# Altium PCB HeaterDongle.PcbDoc
Units mil, origin at the board's own origin, x right, y up, seen from the top; angles counter-clockwise.
Board outline 1230 x 2745 mil, 4 copper layers (Top Layer, Internal Plane 1, Internal Plane 2, Bottom Layer), stack 30.634 mil thick; 7 components, 6 nets, 54 pads, 1 vias.
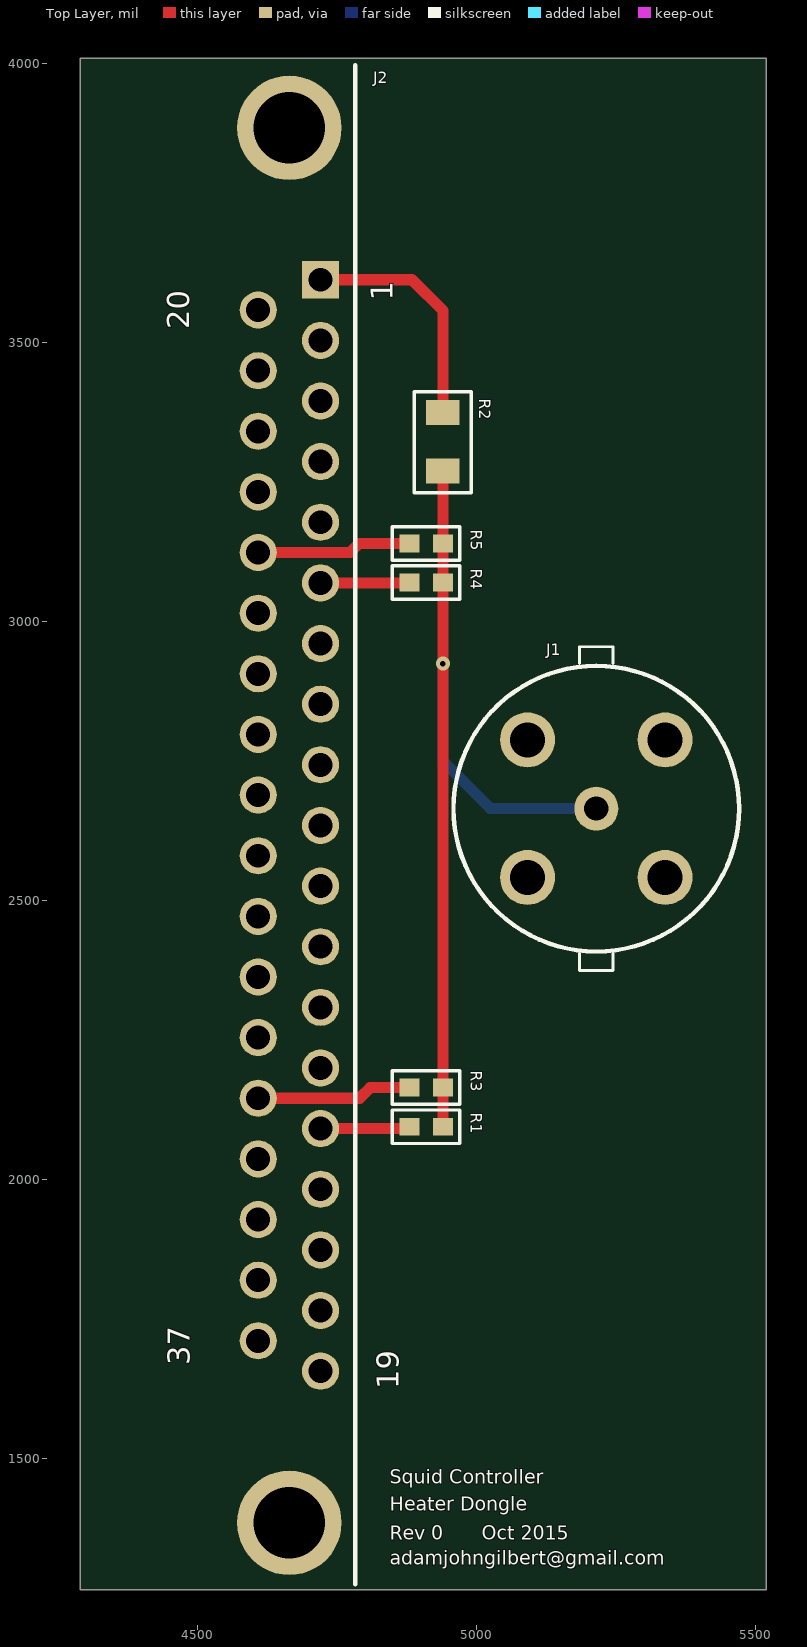
[diagram p0: Top Layer view]
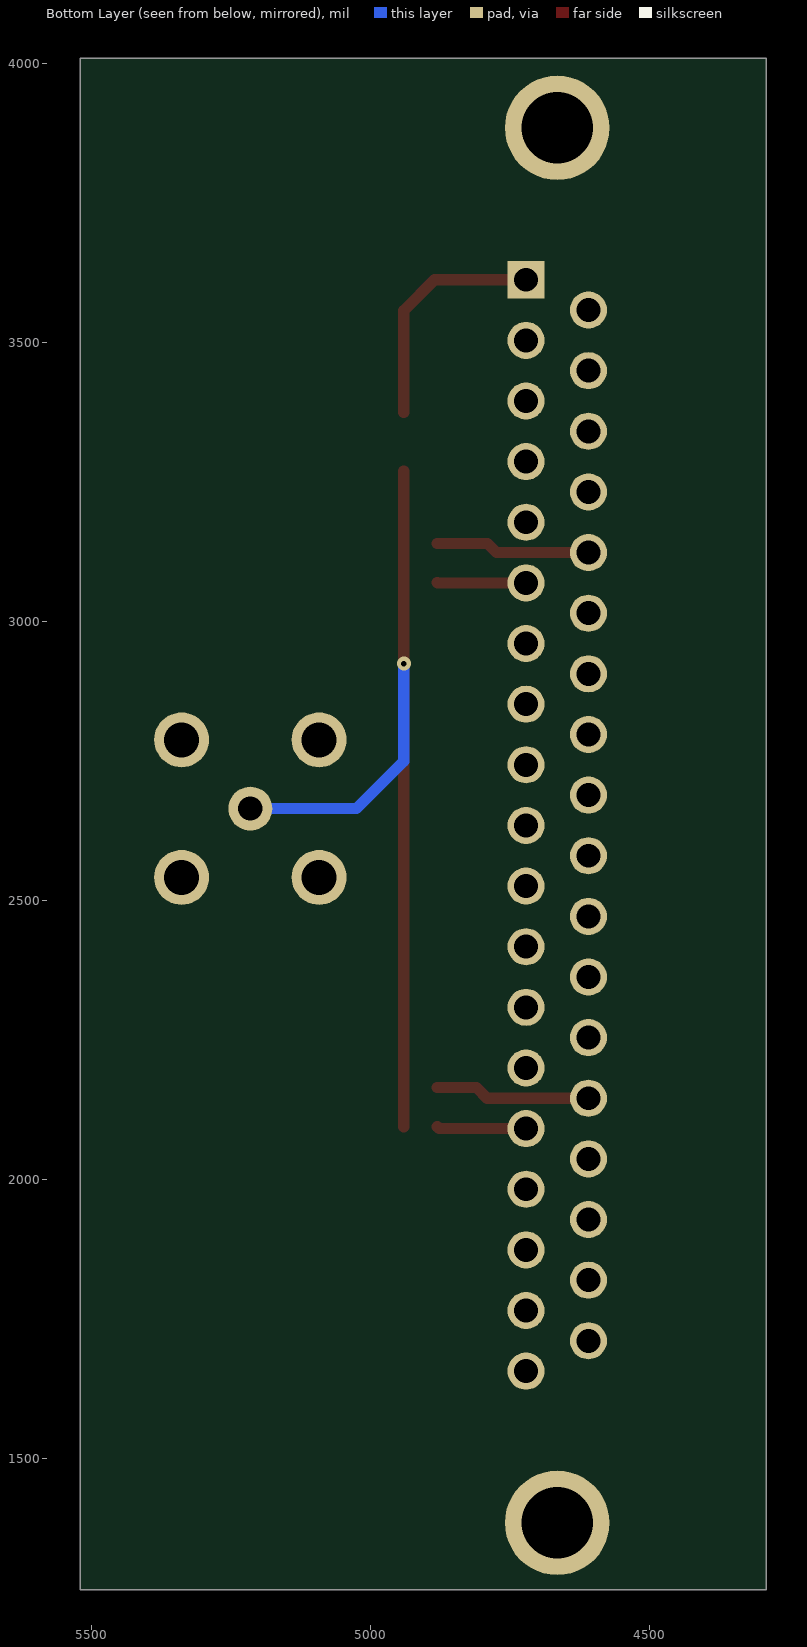
[diagram p1: Bottom Layer view, seen from below]
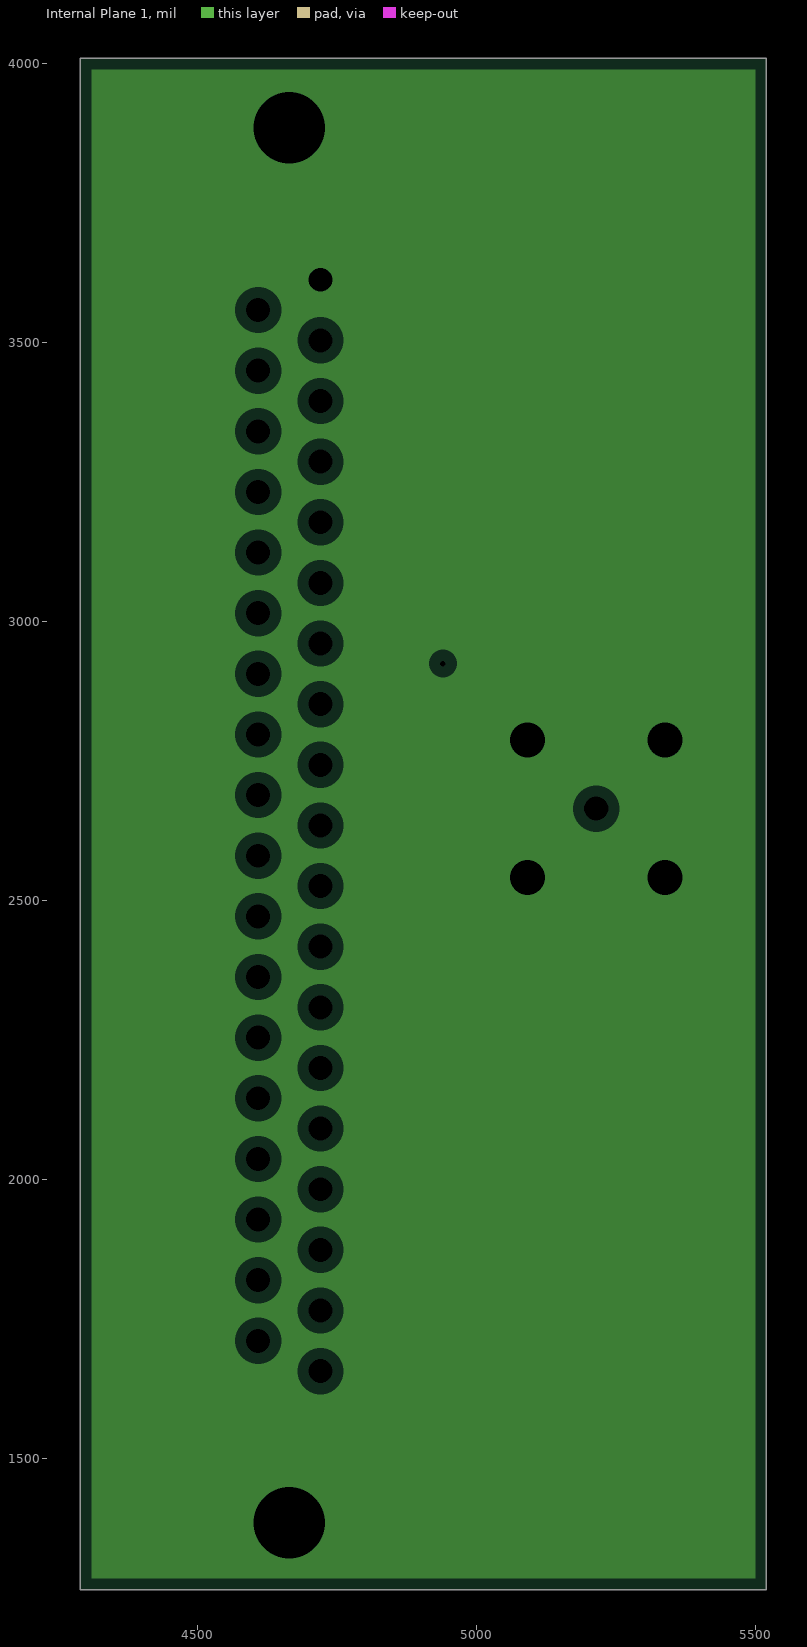
[diagram p2: Internal Plane 1, clearances drawn from the general rule]
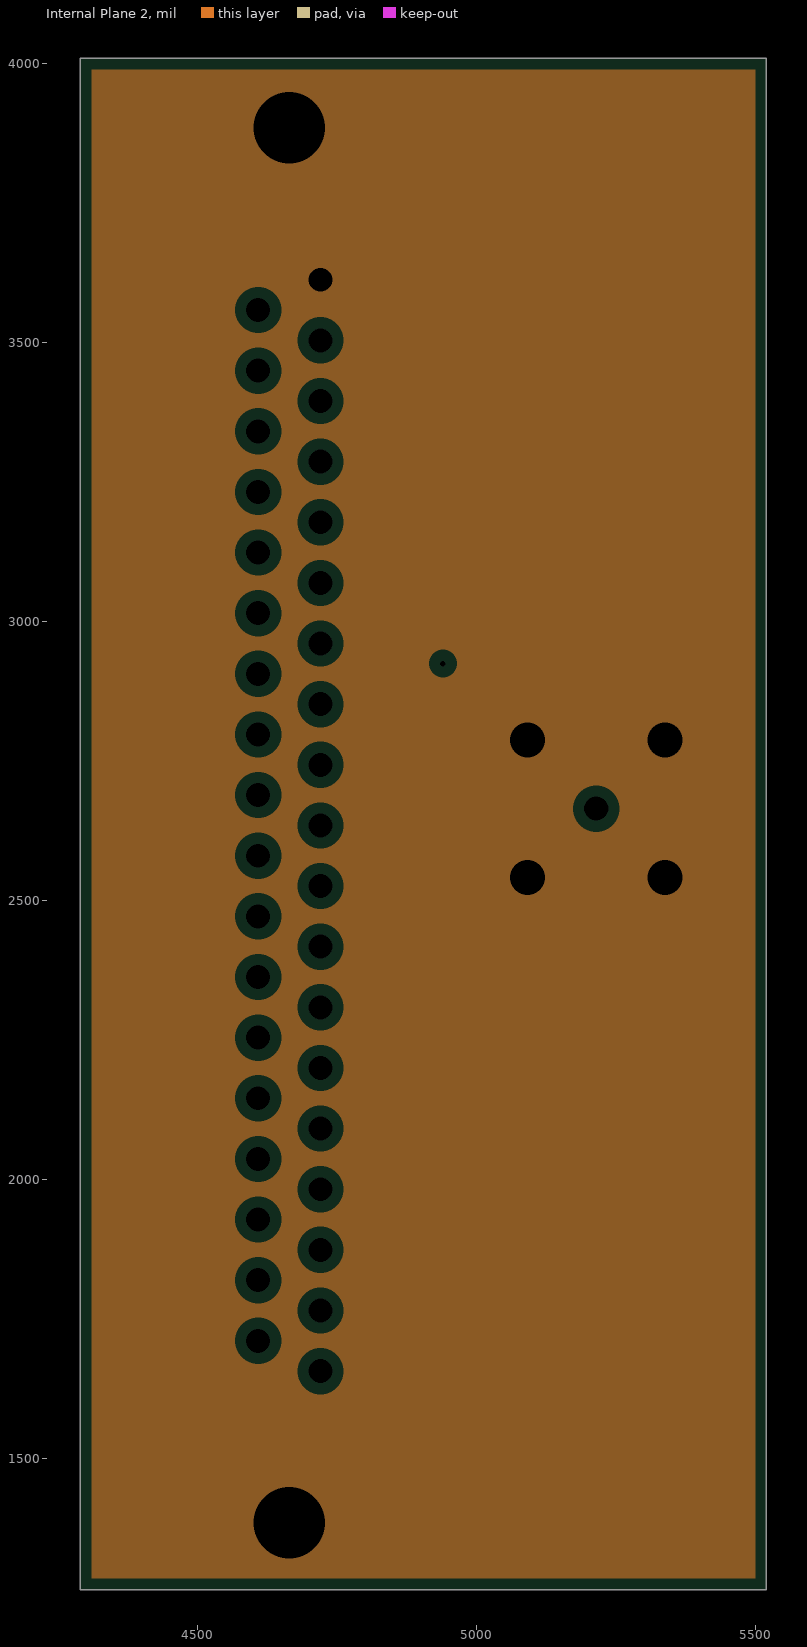
[diagram p3: Internal Plane 2, clearances drawn from the general rule]

## Layer stack, top to bottom
Top Solder: solder mask 0.4, Solder Resist, Dk 3.5
Top Layer: signal copper 1.4
Dielectric 1: core 10, FR-4, Dk 4.2
Internal Plane 1: plane copper 1.417, net GND
Dielectric 3: prepreg 5, Dk 4.2
Internal Plane 2: plane copper 1.417, net GND
Dielectric 2: core 10, Dk 4.2
Bottom Layer: signal copper 1.4
Bottom Solder: solder mask 0.4, Solder Resist, Dk 3.5

## Board outline
4290,1265 5520,1265 5520,4010 4290,4010

## Design rules (kind name [scope] priority, off if disabled: settings)
Clearance [All] p1: gap=10
HoleSize [All] p1: absolutevalues=TRUE maxlimit=200 minlimit=1 maxpercent=80.000 minpercent=20.000
PlaneClearance [All] p1: clearance=20
PlaneConnect [All] p1: planeconnectstyle=Relief reliefexpansion=20 reliefentries=4 reliefconductorwidth=10 reliefairgap=10
PolygonConnect [All] p1: connectstyle=Relief reliefconductorwidth=10 reliefentries=4 polygonreliefangle="90 Angle" airgapwidth=10
RoutingVias [All] p1: holewidth=28 width=50 viastyle="Through Hole" minholewidth=28 minwidth=50 maxholewidth=28 maxwidth=50
SilkToSilkClearance [All] p1: silktosilkclearance=5
SilkToSolderMaskClearance [IsPad] p1: minsilkscreentomaskgap=5 clearancetoexposedcopper=TRUE
SolderMaskExpansion [All] p1: expansion=4
Width [All] p1: maxlimit=100 minlimit=10 preferedwidth=20
25 further rules are at their usual default settings.

## Components (designator, comment, footprint, x,y, rotation, side; value= is the part's Value field where it differs from the comment)
J1 "Vertical BNC" BNCVert 5215,2665 r90 top
J2 "DB37M" DSUB37-M 4665,3885 r90 top
R1 "10k 0603" 0603 4880,2095 r0 top
R2 "100, 1206" 1206 4940,3375 r270 top
R3 "10k 0603" 0603 4880,2165 r0 top
R4 "10k 0603" 0603 4880,3070 r0 top
R5 "10k 0603" 0603 4880,3140 r0 top

## Footprints (in the part's own frame and the unit in brackets; to place one, negate y for a bottom-side part, rotate by r counter-clockwise, add the part's x,y. Pads: shape width x height; smd on the part's side, far side on the other; paste and mask are expansions set on the pad)
0603 [mil]
  rect 36x32 smd: 1(0,0) 2(60,0)
  silkscreen extent -30,-30 90,30, body extent -15,-15 75,15, height 39
1206 [mil]
  rect 45x60 smd: 1(0,0) 2(105,0)
  silkscreen extent -37,-51 144,51, body extent -30,-45 135,45, height 39
BNCVert [mm] "BNCVert"
  round 2.5 hole 1.6: 0(-3.13,3.13) 0(-3.13,-3.13) 0(3.13,3.13) 0(3.13,-3.13)
  round 2 hole 1.1: 1(0,0)
  silkscreen extent -7.37,-6.5 7.37,6.5
DSUB37-M [mm] "DSUB 37Pin Male"
  rect 1.69x1.69 hole 1.09: 1(-6.912,-1.42)
  round 1.69 hole 1.09: 2(-9.672,-1.42) 3(-12.432,-1.42) 4(-15.192,-1.42) 5(-17.952,-1.42) 6(-20.712,-1.42) 7(-23.472,-1.42) 8(-26.232,-1.42) 9(-28.992,-1.42) 10(-31.752,-1.42) 11(-34.512,-1.42) 12(-37.272,-1.42) 13(-40.032,-1.42) 14(-42.792,-1.42) 15(-45.552,-1.42) 16(-48.312,-1.42) 17(-51.072,-1.42) 18(-53.832,-1.42) 19(-56.592,-1.42) 20(-8.291,1.42) 21(-11.051,1.42) 22(-13.811,1.42) 23(-16.571,1.42) 24(-19.331,1.42) 25(-22.091,1.42) 26(-24.851,1.42) 27(-27.611,1.42) 28(-30.371,1.42) 29(-33.131,1.42) 30(-35.891,1.42) 31(-38.651,1.42) 32(-41.411,1.42) 33(-44.171,1.42) 34(-46.931,1.42) 35(-49.691,1.42) 36(-52.451,1.42) 37(-55.211,1.42)
  round 4.76 hole 3.26: 38(0,0) 39(-63.5,0)
  silkscreen extent -66.29,-3 2.84,-3

## Part data
J1: library part BNCVertical
R1 R3 R4 R5: library part "RES 0603", "Resistor"
R2: library part "RES 1206", "RES 100 OHM 1/4W 1206 SMD"

## Via types
v1: diameter 25, hole 10, Top Layer to Bottom Layer, 1 vias

## Nets (pads, with @x,y where several pads share a name; then routed paths per layer and width w, separated by ;. In a path a pad name is that pad's centre, name@x,y a point inside that pad or via, vN(x,y) a via of type N, cw(c..) or ccw(c..) an arc to the next point about the centre after c; other vN are vias at no path point)
GND: J1.0 J2.1 J2.38 J2.39 R2.1 | length 424.8
  Top Layer w20: J2.1 4885,3612.88 4940,3557.88 R2.1
HEATER1: J2.15 R1.1 | length 160.5
  Top Layer w20: J2.15 4876.62,2091.62 R1.1
HEATER2: J2.33 R3.1 | length 278.8
  Top Layer w20: J2.33 4790.99,2145.99 4810,2165 R3.1
HEATER3: J2.6 R4.1 | length 159.3
  Top Layer w20: J2.6 4879.57,3069.57 R4.1
HEATER4: J2.24 R5.1 | length 277.6
  Top Layer w20: J2.24 4773.94,3123.94 4790,3140 R5.1
NetJ1_1: J1.1 R1.2 R2.2 R3.2 R4.2 R5.2 | length 1660.2
  Top Layer w20: R1.2 R3.2 R4.2 R5.2 R2.2
  Bottom Layer w20: v1(4940,2925) 4940,2750 5025,2665 J1.1
pads on no net: J2.2 J2.3 J2.4 J2.5 J2.7 J2.8 J2.9 J2.10 J2.11 J2.12 J2.13 J2.14 J2.16 J2.17 J2.18 J2.19 J2.20 J2.21 J2.22 J2.23 J2.25 J2.26 J2.27 J2.28 J2.29 J2.30 J2.31 J2.32 J2.34 J2.35 J2.36 J2.37

## Polygon pours and split planes (outlines as drawn)
GND on Internal Plane 1 (split plane): 5499.9,1285.1 4310.1,1285.1 4310.1,3989.9 5499.9,3989.9
GND on Internal Plane 2 (split plane): 5499.9,1285.1 4310.1,1285.1 4310.1,3989.9 5499.9,3989.9

## Silkscreen, mask and mechanical layers (free items; w line width, h text height)
Top Overlay:
  text "Squid Controller" at 4845,1455 h25
  text "Heater Dongle" at 4845,1406.67 h25
  text "Rev 0" at 4845,1355 h25
  text "Oct 2015" at 5010,1355 h25
  text "adamjohngilbert@gmail.com" at 4845,1310 h25
Mechanical 1:
  lines w5: 4290,1265 5520,1265 5520,1275 5520,4010 5475,4010 5250,4010 4290,4010 4290,1265

## Text inside footprints (layer, text, board x,y; h text height)
J2: Top Overlay "20" at 4485.98,3524.25 h40 r90; Top Overlay "19" at 4860.98,1624.25 h40 r90; Top Overlay "1" at 4850,3575 h40 r90; Top Overlay "37" at 4486.85,1667.11 h40 r90